# Altium PCB Sensor-Board_CONTROLLER.PcbDoc
Units mm, origin at the board's own origin, x right, y up, seen from the top; angles counter-clockwise.
Board outline 152.4 x 101.6 mm, 2 copper layers (Top Layer, Bottom Layer); 47 components, 37 nets, 154 pads, 25 vias.
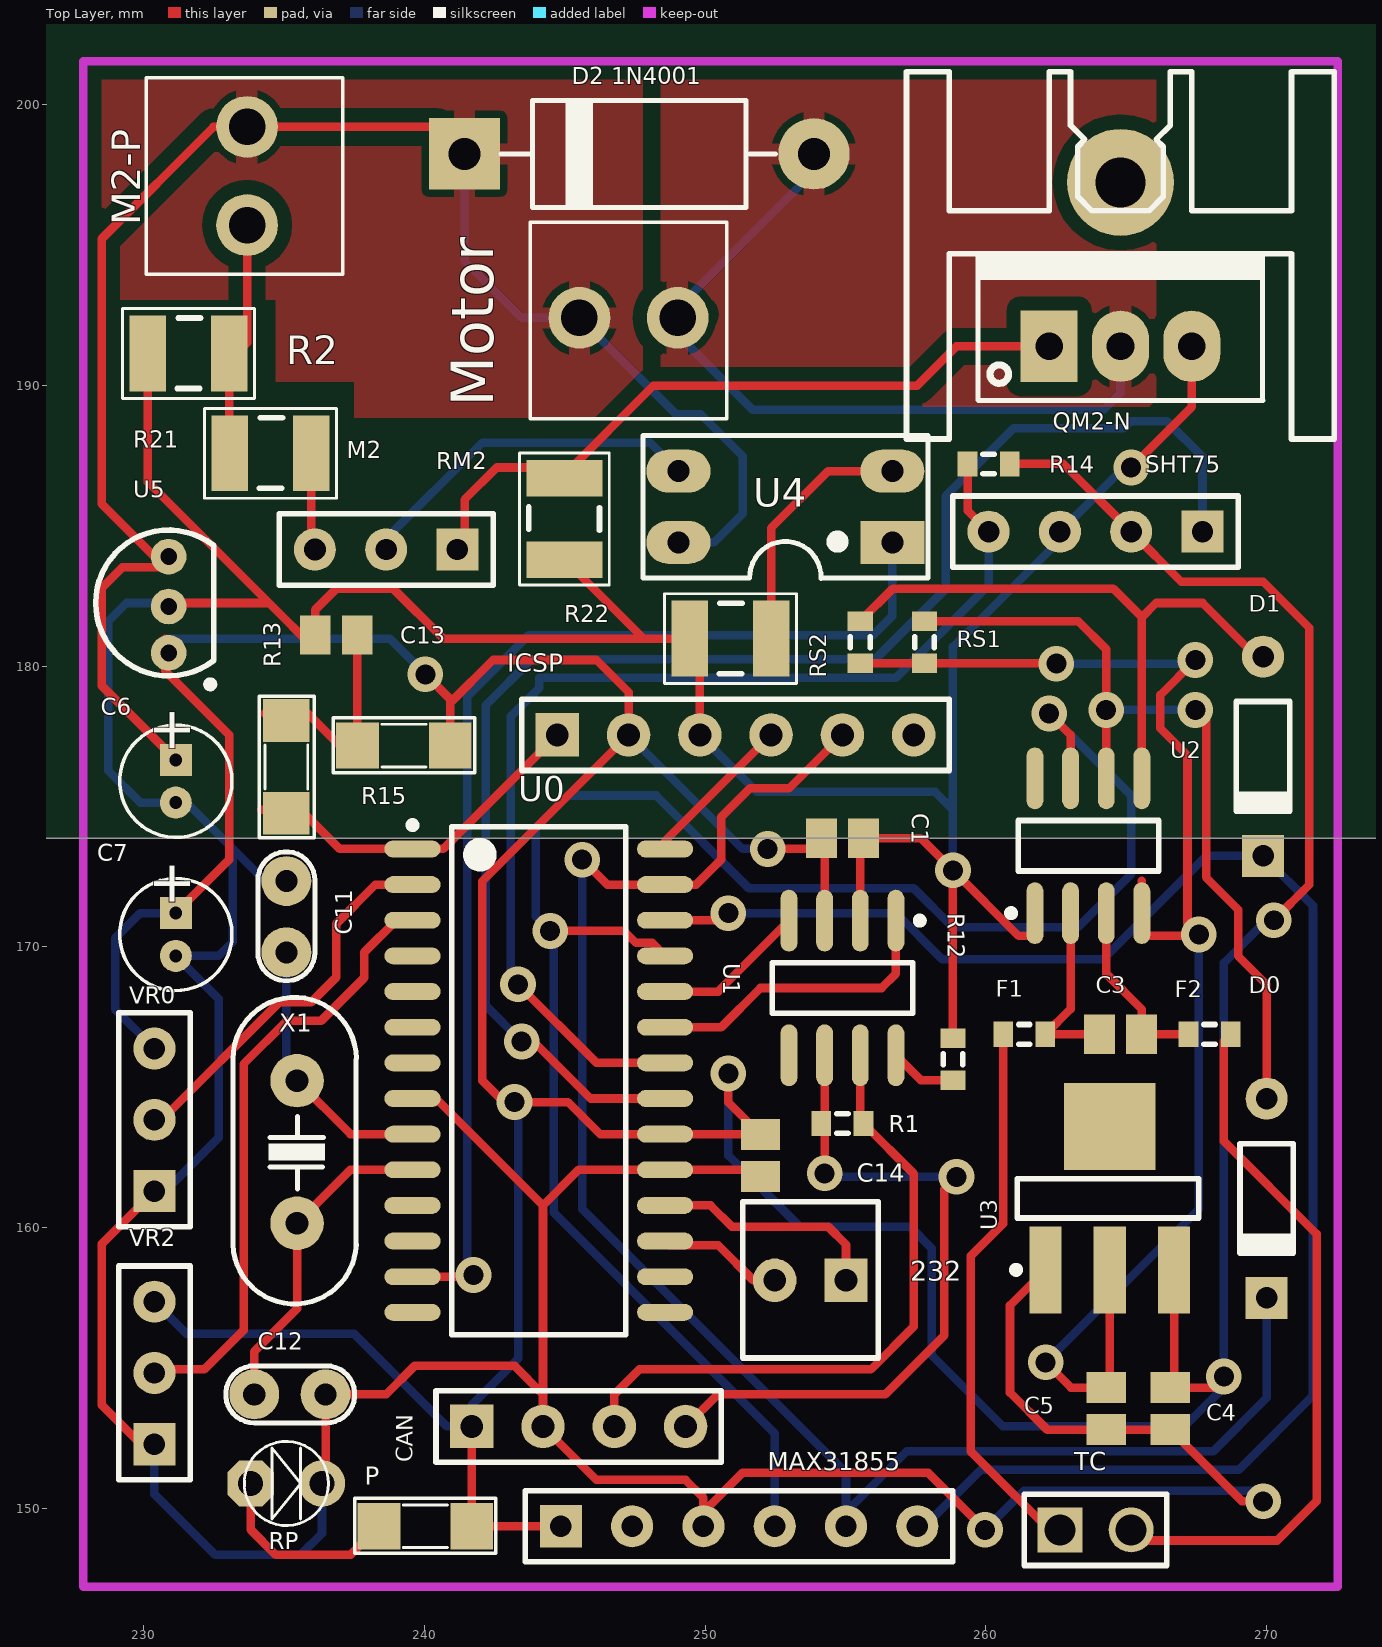
[diagram p0: Top Layer view]
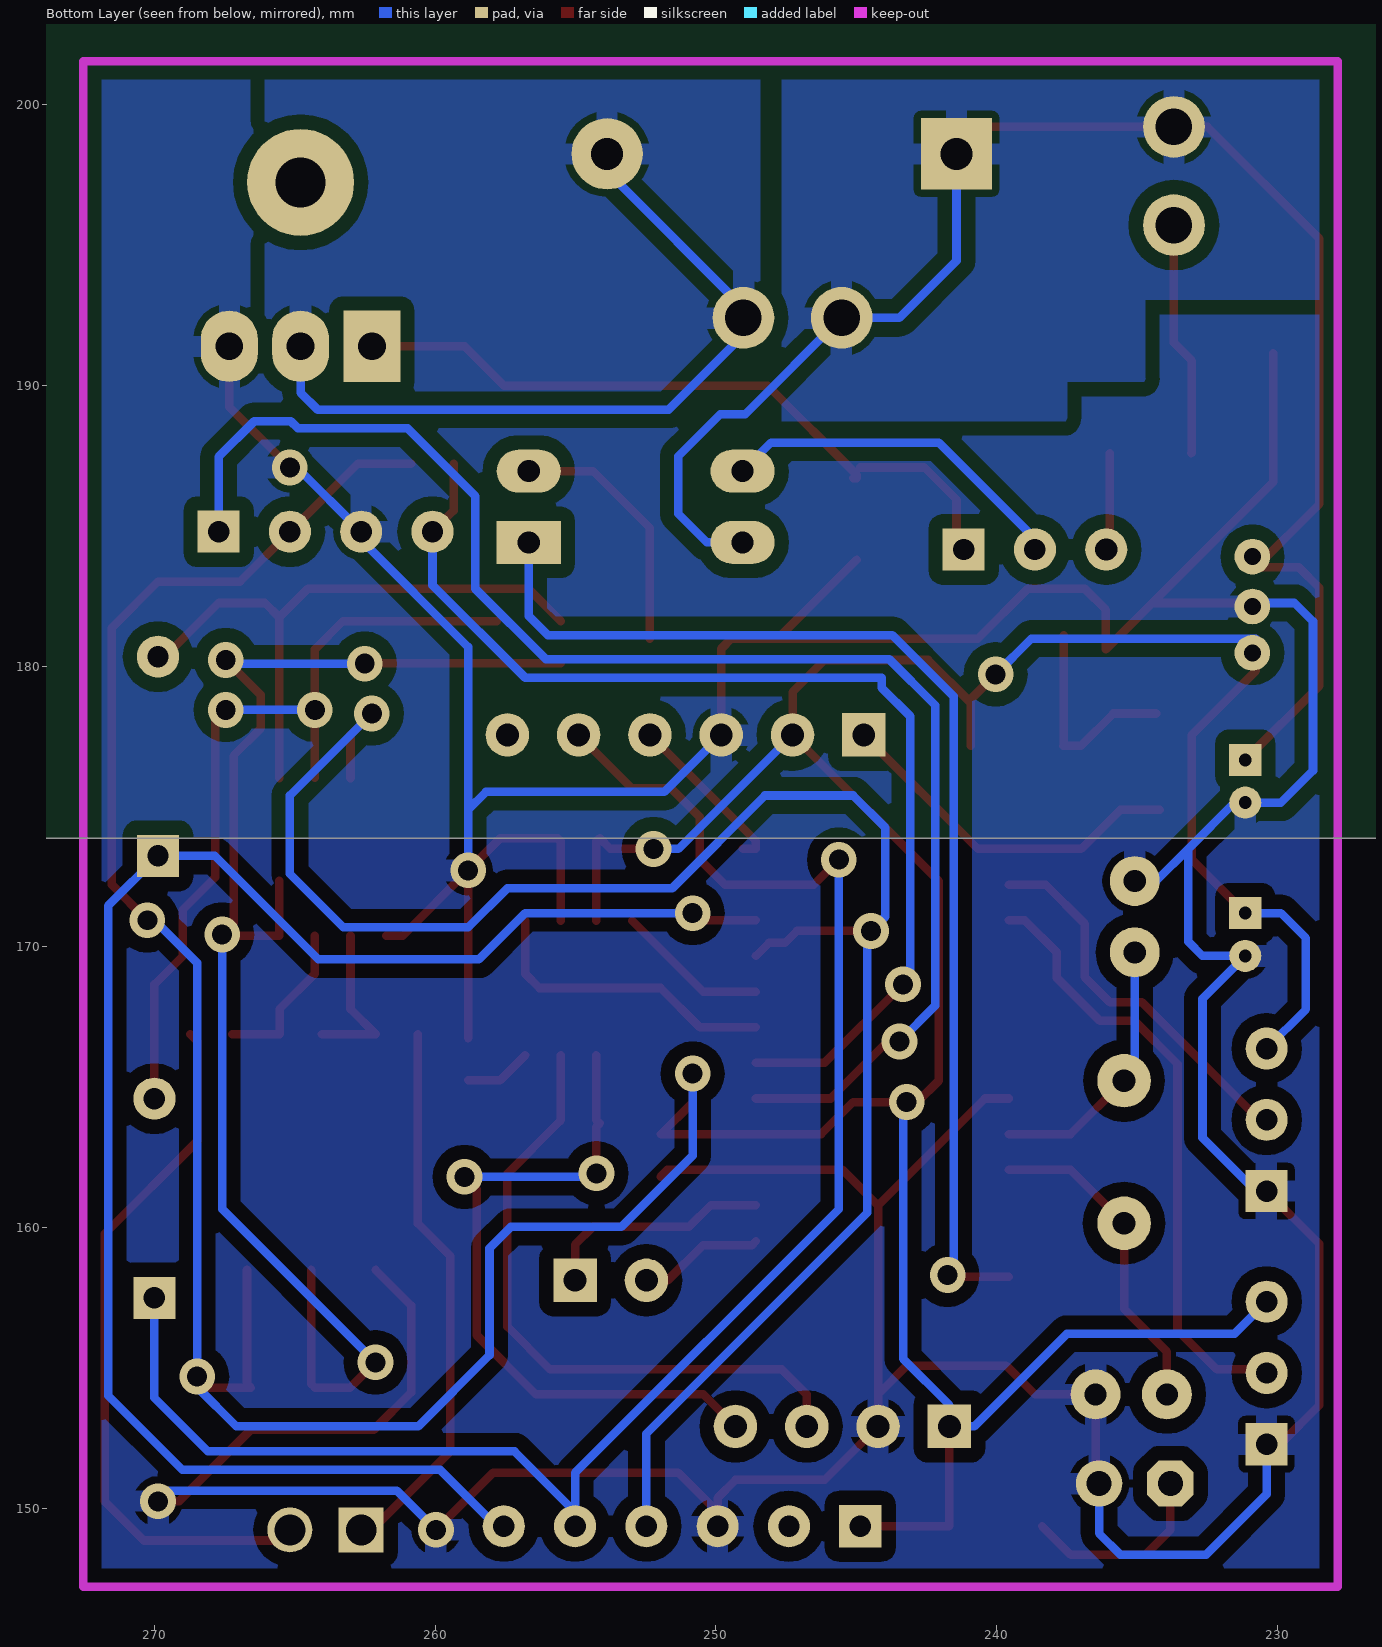
[diagram p1: Bottom Layer view, seen from below]

## Layer stack, top to bottom
Top Solder: solder mask 0.0102, Solder Resist, Dk 3.5
Top Layer: signal copper 0.0356
Dielectric 1: dielectric 0.32, FR-4, Dk 4.8
Bottom Layer: signal copper 0.0356
Bottom Solder: solder mask 0.0102, Solder Resist, Dk 3.5

## Board outline
145.923,173.863 298.323,173.863 298.323,275.463 145.923,275.463

## Design rules (kind name [scope] priority, off if disabled: settings)
Clearance "PolyGon Pour Clearance" [InPolyGon] p1: gap=0.508
Clearance [All] p2: gap=0.356
PolygonConnect [All] p1: connectstyle=Relief reliefconductorwidth=0.762 reliefentries=4 polygonreliefangle="90 Angle" airgapwidth=0.254
RoomDefinition max31855_controller_board [InComponentClass('max31855_controller_board')] p1: confinementstyle=ConfineIn formatcopy=TRUE lockcomponents=FALSE outline 299.466,175.387 303.022,175.387 303.022,180.213 299.466,180.213
RoutingVias [All] p1: holewidth=0.711 width=1.27 viastyle="Through Hole" minholewidth=0.711 minwidth=1.27 maxholewidth=0.711 maxwidth=1.27
SolderMaskExpansion [All] p1: expansion=0.102
Width VCC1 [(InNet('VCC1') AND InNet('VCC'))] p1: maxlimit=0.356 minlimit=0.356 preferedwidth=0.356
Width [All] p2: maxlimit=0.305 minlimit=0.305 preferedwidth=0.305
29 further rules are at their usual default settings.

## Components (designator, comment, footprint, x,y, rotation, side; value= is the part's Value field where it differs from the comment)
232 "Header2" HDR2 255.016,158.115 r180 top
C1 "Cap Pol3" C0805 254.889,173.863 r0 top
C3 "Cap Pol3" C0805 264.795,166.878 r0 top
C4 "Cap Pol3" C0805 266.573,153.543 r270 top
C5 "Cap Pol3" C0805 264.287,153.543 r270 top
C6 "10uF/35V" CA-ALU-4 231.14,175.895 r270 top
C7 "20uF/35V" CA-ALU-4 231.14,170.434 r270 top
C11 "22pF" CN1 235.077,171.069 r90 top
C12 "22pF" CN1 235.204,154.051 r0 top
C13 "Cap Pol3" C0805 236.855,181.102 r180 top
C14 "Cap Pol3" C0805 251.968,162.56 r270 top
CAN "Header 4" HDR1X4#1 241.681,152.908 r0 top
D0 "Diode 1N4148" DO-35 270.002,161.036 r270 top
D1 "Diode 1N4148" DO-35 269.875,176.784 r270 top
"D2 1N4001" "Diode" DIO-3A 240.792,198.247 r0 top
F1 "Res3" J1-0603 261.366,166.878 r180 top
F2 "Res3" J1-0603 267.97,166.878 r0 top
ICSP "Header 6" HDR1X6#1 244.729,177.546 r0 top
M2 "Header 3" HDR1X3#1 241.173,184.15 r180 top
M2-P "KF2" KF2-3.5 233.68,197.457 r270 top
MAX31855 "Header 6" HDR1X6#2 244.856,149.352 r0 top
Motor "Motor" KF2-3.5 247.269,192.405 r0 top
P "LED" LED-3MM-YELLOW 233.807,150.876 r0 top
QM2-N "IRF840" TO220H1 264.795,191.389 r0 top
R1 "Res3" J1-0603 254.889,163.703 r0 top
R2 "47K" RES-SMD-1210 231.648,191.135 r180 top
R12 "Res3" J1-0603 258.826,165.989 r90 top
R13 "470" SM-RES-1206 235.077,178.054 r270 top
R14 "Res3" J1-0603 260.096,187.198 r180 top
R15 "10k" SM-RES-1206 237.617,177.165 r0 top
R21 "47K" RES-SMD-1210 234.569,187.579 r180 top
R22 "10K" RES-SMD-1210 250.952,180.975 r180 top
RM2 "47K" RES-SMD-1210 244.983,185.293 r270 top
RP "10k" SM-RES-1206 238.379,149.352 r0 top
RS1 "Res3" J1-0603 257.81,180.848 r270 top
RS2 "Res3" J1-0603 255.524,180.848 r270 top
SHT75 "Header 4" HDR1X4#2 267.716,184.785 r180 top
TC "JP2" JP2-D1T 262.636,149.225 r0 top
U0 "PIC18F2480T-I/SO" SOIC-SO28_L 244.072,165.227 r0 top
U1 "MCP2551-E/SN" SOIC-SN8_N 254.889,168.529 r270 top
U2 "Component_1" "SOP8 - duplicate" 267.716,169.913 r90 top
U3 "Component_1" SOT229P700X460-4N 264.414,161.036 r90 top
U4 "PC817" DIP4 256.667,184.404 r90 top
U5 "LM78L05ACZ" PCBComponent_1 217.551,182.245 r0 top
VR0 "Header 3" HDR1X3#2 230.378,161.29 r90 top
VR2 "Header 3" HDR1X3#2 230.378,152.273 r90 top
X1 "12Mhz" XT2 235.458,162.687 r90 top

## Footprints (in the part's own frame and the unit in brackets; to place one, negate y for a bottom-side part, rotate by r counter-clockwise, add the part's x,y. Pads: shape width x height; smd on the part's side, far side on the other; paste and mask are expansions set on the pad)
C0805 [mm] "Chip Capacitor, Body 2.0x1.3mm, IPC High Density"
  rect 1.1x1.4 smd: 1(-0.75,0) 2(0.75,0)
  body extent -1.1,-0.72 1.1,0.72, height 1.4
CA-ALU-4 [mil] "Polarized capacitors, Aluminum Electrolytic Capacitors, 2-Leads, Body 5x11x2x0.5"
  rect 45x45 hole 18: 1(-30,0)
  round 45 hole 18: 2(30,0)
  silkscreen extent -79,-79 79,79, body extent -79,-77 79,80, height 295
CN1 [mil]
  round 70 hole 31: 1(-50,0) 2(50,0)
  silkscreen extent -90,-40 91,40, body extent -115,-33 115,33, height 265
DIO-3A [mil] "Diode 3A"
  round 100 hole 45: 1(515,0)
  rect 100x100 hole 45: 2(25,0)
  silkscreen extent 76,-75 461,75, body extent 4,-72 536,70, height 142
DIP4 [mil]
  rect 60x90 hole 31: 1(0,0)
  oval 60x90 hole 31: 2(100,0) 3(100,300) 4(0,300)
  silkscreen extent -50,-50 150,350, body extent -59,-10 159,305, height 170
DO-35 [mm] "Diode, Axial; Body 3.8 x 1.9 mm (LxDia. max), Lead Dia. 0.53 mm (max)"
  round 1.5 hole 0.762: 1(-3.55,0)
  rect 1.5x1.5 hole 0.762: 2(3.55,0)
  silkscreen extent -1.95,-0.95 2.05,0.95
HDR1X3#1 [mm] "Connector; Header; 3 Position"
  rect 1.5x1.5 hole 0.762: 1(0,0)
  round 1.5 hole 0.762: 2(2.54,0)
  round 1.5 hole 0.787: 3(5.08,0)
  silkscreen extent -1.27,-1.27 6.35,1.27
HDR1X3#2 [mm] "Connector; Header; 3 Position"
  rect 1.5x1.5 hole 0.762: 1(0,0)
  round 1.5 hole 0.762: 2(2.54,0) 3(5.08,0)
  silkscreen extent -1.27,-1.27 6.35,1.27
HDR1X4#1 [mil] "Connector; Header; 4 Position"
  rect 61x61 hole 32: 1(0,0)
  round 61 hole 32: 2(100,0) 3(200,0) 4(300,0)
  silkscreen extent -50,-50 350,50
HDR1X4#2 [mil] "Connector; Header; 4 Position"
  rect 59.06x59.06 hole 30: 1(0,0)
  round 59.06 hole 30: 2(100,0) 3(200,0) 4(300,0)
  silkscreen extent -50,-50 350,50
HDR1X6#1 [mil] "Connector; Header; 6 Position"
  rect 61x61 hole 32: 1(0,0)
  round 61 hole 32: 2(100,0) 3(200,0) 4(300,0) 5(400,0) 6(500,0)
  silkscreen extent -50,-50 550,50
HDR1X6#2 [mil] "Connector; Header; 6 Position"
  rect 59.06x59.06 hole 30: 1(0,0)
  round 59.06 hole 30: 2(100,0) 3(200,0) 4(300,0) 5(400,0) 6(500,0)
  silkscreen extent -50,-50 550,50
HDR2 [mil] "Connector; Header; 2 Position"
  rect 61x61 hole 32: 1(0,0)
  round 61 hole 32: 2(100,0)
  silkscreen extent -45,-110 145,109, body extent -50,-115 150,113, height 461
J1-0603 [mm] "Chip Resistor, Body 1.6x0.8mm, IPC High Density"
  rect 0.7x0.9 smd: 1(-0.75,0) 2(0.75,0)
  silkscreen extent -0.2,-0.35 0.2,0.35, body extent -0.85,-0.48 0.85,0.48, height 0.9
JP2-D1T [mm] "2 pins, 1 row, straight, gold plating"
  rect 1.6x1.6 hole 1.1: 1(0,0)
  round 1.6 hole 1.1: 2(2.54,0)
  silkscreen extent -1.27,-1.27 3.81,1.27, body extent -1.27,-1.27 3.81,1.27, height 8.54
KF2-3.5 [mm] "3,50mm - modular - blue - Horizontal wire entry - Pressure clamp - 8,4mm height - 02p"
  round 2.2 hole 1.3: 1(-1.75,0) 2(1.75,0)
  silkscreen extent -3.5,-3.6 3.5,3.4, body extent -3.95,-3.6 4.05,3.4, height 8.41
LED-3MM-YELLOW [mil]
  oct 65x65 hole 35: 1(0,0)
  round 65 hole 35: 2(100,0)
  silkscreen extent -9,-59 109,59, body extent -27,-77 117,80, height 181
PCBComponent_1 [mm]
  round 1.27 hole 0.6: 1(13.335,-1.778) 2(13.335,-0.127) 3(13.335,1.651)
  silkscreen extent 10.74,-3.02 14.94,2.6, body extent 10.72,-2.61 14.94,2.61, height 5.2
RES-SMD-1210 [mm] "Chip Capacitor, Body 3.2x2.5mm, IPC Medium Density"
  rect 1.3x2.7 smd: 1(-1.397,0) 2(1.503,0)
  silkscreen extent -2.3,-1.6 2.4,1.6, body extent -1.6,-1.25 1.6,1.25, height 0.6
SM-RES-1206 [mil]
  rect 60x65 smd: 1(0,0) 2(130,0)
  silkscreen extent -34,-38 164,39, body extent 2,-31 128,32, height 40
SOIC-SN8_N [mm] "SOIC, 8-Leads, Body 4.9x3.8mm, Pitch 1.27mm, IPC Medium Density"
  oval 2.2x0.6 smd: 1(-2.4,1.905) 2(-2.4,0.635) 3(-2.4,-0.635) 4(-2.4,-1.905) 5(2.4,-1.905) 6(2.4,-0.635) 7(2.4,0.635) 8(2.4,1.905)
  silkscreen extent -2.52,-2.5 0.9,2.88, body extent -2,-2.5 2,2.5, height 1.75
SOIC-SO28_L [mm] "SOIC, 28-Leads, Body 17.9x7.5mm, Pitch 1.27mm, IPC High Density"
  oval 2x0.6 smd: 1(-4.5,8.255) 2(-4.5,6.985) 3(-4.5,5.715) 4(-4.5,4.445) 5(-4.5,3.175) 6(-4.5,1.905) 7(-4.5,0.635) 8(-4.5,-0.635) 9(-4.5,-1.905) 10(-4.5,-3.175) 11(-4.5,-4.445) 12(-4.5,-5.715) 13(-4.5,-6.985) 14(-4.5,-8.255) 15(4.5,-8.255) 16(4.5,-6.985) 17(4.5,-5.715) 18(4.5,-4.445) 19(4.5,-3.175) 20(4.5,-1.905) 21(4.5,-0.635) 22(4.5,0.635) 23(4.5,1.905) 24(4.5,3.175) 25(4.5,4.445) 26(4.5,5.715) 27(4.5,6.985) 28(4.5,8.255)
  silkscreen extent -4.62,-9.05 3.1,9.23, body extent -3.8,-9.06 3.8,9.06, height 2.65
"SOP8 - duplicate" [mm]
  oval 2.2x0.6 smd: 1(1.283,5.969) 2(1.283,4.699) 3(1.283,3.429) 4(1.283,2.159) 5(6.083,2.159) 6(6.083,3.429) 7(6.083,4.699) 8(6.083,5.969)
  silkscreen extent 1.16,1.56 4.58,6.94, body extent 1.68,1.56 5.68,6.56, height 1.75
SOT229P700X460-4N [mm] "SOT223, 4-Leads, Body 10,90x7,00mm (avg), Pitch 2,29mm, IPC Medium Density"
  rect 3.1x1.143 smd: 1(-2.55,2.29) 2(-2.55,0) 3(-2.55,-2.29)
  rect 3.1x3.25 smd: 4(2.55,0)
  silkscreen extent -2.67,-3.17 0.7,3.46, body extent -1.85,-3.43 1.85,3.17, height 4.6
TO220H1 [mil] "TO-220 - 1-2-3"
  round 150 hole 70: 0(0,230)
  rect 80x100 hole 39: 1(-100,0)
  oval 80x100 hole 39: 2(0,0) 3(100,0)
  silkscreen extent -300,-130 300,385, body extent -246,-82 250,329, height 1000
XT2 [mil] "Footpin for Crystal 2 pin"
  round 75 hole 32: 1(-100,0) 2(100,0)
  silkscreen extent -213,-83 217,90, body extent -216,-87 216,90, height 144

## Part data
232: "Header IDC, 2 x 1 Pin Vertical 2.54mm Pitch (Non-Boxed, Male)"
C1 C3 C4 C5 C13 C14: "Polarized Capacitor (Surface Mount)"
C6 C7: library part CN-ALU-DIP, "Capacitor (Semiconductor SIM Model)"
C11 C12: library part CN0, "Cremic For Xtal 1pF => 100pF"
CAN SHT75: "Header, 4-Pin"
D0 D1: "High Conductance Fast Diode"
"D2 1N4001": "Default Diode"
F1 F2 R1 R12 R14 RS1 RS2: "Resistor"
ICSP MAX31855: "Header, 6-Pin"
M2 VR0 VR2: "Header, 3-Pin"
Motor: library part KF2
P: "LED Single colour Green and Red"
QM2-N: "MOSFET N - CHANNEL 500V - 0.75 - 8A - TO-220"
R2 R21 R22 RM2: library part Res-SMD, "Resistor"
R13 R15 RP: library part R, "Resistor 1/4W"
TC: "WR-PHD 2.54 mm Angled Socket Header"
U0: "Enhanced Flash Microcontroller with ECAN Technology, 10-Bit A/D and nanoWatt Technology, 16K Flash, 28-Pin SOIC, Industrial Temperature Range, Tape and Reel"
U1: "High-Speed CAN Transceiver, 8-Pin SOIC, Extended Temperature"
U4: "Single Opto"
U5: "3-Terminal Positive Regulators, 3-pin TO-92"
X1: library part XT2, "Crystal, 32.768 KHz, -40 to 85 degC, 3.2 x 1.5 x 0.9 mm SMD"

## Via types
v1: diameter 1.27, hole 0.711, Top Layer to Bottom Layer, 25 vias

## Nets (pads, with @x,y where several pads share a name; then routed paths per layer and width w, separated by ;. In a path a pad name is that pad's centre, name@x,y a point inside that pad or via, vN(x,y) a via of type N, cw(c..) or ccw(c..) an arc to the next point about the centre after c; other vN are vias at no path point)
3.3V: C5.1 RS1.2 RS2.2 U2.4 U3.2 | length 51.4
  Top Layer w0.305: RS2.2 RS1.2 262.497,180.098 v1(262.509,180.086) ; v1(262.128,155.194) 263.029,154.293 C5.1 264.414,154.42 U3.2 ; 265.557,172.351 U2.4 265.557,170.383 267.538,170.383 v1(267.589,170.434) 267.183,170.84 267.183,176.809 266.217,177.775 266.217,178.968 v1(267.462,180.213)
  Bottom Layer w0.305: v1(262.128,155.194) 267.589,160.655 v1(267.589,170.434) v1@267.335,170.434 ; v1(262.509,180.086) 267.335,180.086 v1(267.462,180.213)
GND1: C1.2 C4.2 C5.2 C6.2 C7.2 C11.2 C12.2 C13.2 C14.2 CAN.2 ICSP.3 MAX31855.3 P.2 QM2-N.3 R2.2 R12.2 R22.2 RM2.2 SHT75.3 U0.8 U0.19 U1.2 U2.1 U3.1 U5.2 VR0.1 VR2.1 | length 222.4
  Top Layer w0.305: R2.2 230.145,186.554 234.454,182.245 ; VR2.1 229.895,152.273 228.498,153.67 228.498,159.41 VR0.1 ; U5.2@230.759,182.245 234.454,182.245 ; P.2 236.474,151.003 C12.2 238.633,154.051 239.649,155.067 243.205,155.067 244.221,154.051 ; U0.8 240.411,164.592 244.221,160.782 ; RM2.2 247.798,180.975 ; ICSP.3 249.809,180.615 R22.2 247.798,180.975 ; MAX31855.3@249.936,149.098 MAX31855.3 MAX31855.3@249.936,149.86 ; C14.2 251.726,162.052 U0.19 245.491,162.052 244.221,160.782 ; U1.2 255.524,173.748 C1.2 257.683,173.863 v1(258.826,172.72) ; R12.2 v1(258.826,172.72) ; v1(259.969,149.225) 257.937,151.257 251.333,151.257 MAX31855.3@249.936,149.86 ; U2.1@261.747,170.383 261.163,170.383 v1(258.826,172.72) ; U3.1 260.858,157.22 260.858,154.114 262.186,152.787 262.624,152.793 C5.2 C4.2 269.125,150.241 v1(269.875,150.241) ; v1(265.176,187.071) 267.335,189.23 QM2-N.3 ; 234.454,182.245 236.105,180.594 C13.2 236.105,182.003 236.855,182.753 238.887,182.753 240.665,180.975 247.798,180.975 ; 244.221,154.051 CAN.2 246.126,151.003 249.301,151.003 249.936,150.368 MAX31855.3@249.936,149.86 ; 244.221,154.051 244.221,160.782
  Bottom Layer w0.305: VR2.1 230.378,150.495 232.537,148.336 235.585,148.336 236.347,149.098 P.2 ; VR0.1 230.759,161.29 232.664,163.195 232.664,168.148 C7.2 232.664,169.672 233.172,170.18 233.172,173.482 ; U5.2@230.759,182.245 229.387,182.245 228.727,181.585 228.727,176.276 229.87,175.133 C6.2 231.521,175.133 233.172,173.482 ; C11.2@235.585,172.339 C11.2 234.315,172.339 233.172,173.482 ; ICSP.3 251.841,175.514 258.191,175.514 258.826,174.879 ; v1(258.826,172.72) 258.826,174.879 ; v1(259.969,149.225) 261.366,150.622 269.494,150.622 v1(269.875,150.241) ; v1(265.176,187.071) 264.922,187.071 SHT75.3 262.636,184.486 258.826,180.676 258.826,174.879
Net232_1: 232.1 U0.18 | length 8.3
  Top Layer w0.305: U0.18 250.19,160.782 250.952,160.02 254.381,160.02 255.016,159.385 232.1
Net232_2: 232.2 U0.17 | length 4.5
  Top Layer w0.305: U0.17 248.724,159.36 250.469,159.36 251.714,158.115 232.2
NetC3_1: C3.1 F1.1 U2.2 | length 5.8
  Top Layer w0.305: U2.2@263.017,170.383 263.017,167.779 F1.1 C3.1
NetC3_2: C3.2 F2.1 U2.3 | length 5.7
  Top Layer w0.305: U2.3@264.287,170.383 264.287,169.037 265.545,167.779 C3.2 F2.1
NetC11_1: C11.1 U0.9 X1.2 | length 9.6
  Top Layer w0.305: X1.2 237.363,163.322 U0.9
  Bottom Layer w0.305: C11.1 235.077,165.608 X1.2
NetC12_1: C12.1 U0.10 X1.1 | length 11.6
  Top Layer w0.305: C12.1 233.934,155.575 235.458,157.099 X1.1 237.363,162.052 U0.10
NetC13_1: C13.1 R13.1 R15.1 | length 7.7
  Top Layer w0.305: R13.1@234.315,178.308 235.839,178.308 236.982,177.165 R15.1 237.605,177.177 C13.1
NetCAN_3: CAN.3 R1.2 U1.7 | length 23.3
  Top Layer w0.305: CAN.3 246.761,154.051 247.65,154.94 255.905,154.94 257.429,156.464 257.429,161.913 R1.2 255.524,163.818 U1.7
NetCAN_4: CAN.4 R1.1 U1.6 | length 25.4
  Top Layer w0.305: CAN.4 250.444,154.051 256.413,154.051 258.521,156.159 258.521,161.366 v1(258.953,161.798) ; v1(254.254,161.925) 254.254,163.588 R1.1 254.254,163.818 U1.6
  Bottom Layer w0.305: v1(254.254,161.925) 254.381,161.798 v1(258.953,161.798)
NetD0_1: D0.1 RS1.1 U2.6 | length 29.5
  Top Layer w0.305: RS1.1 263.283,181.598 264.287,180.594 v1(264.287,178.435) U2.6@264.287,176.022 ; v1(267.462,178.435) 267.843,178.054 267.843,172.466 268.986,171.323 268.986,169.672 270.002,168.656 D0.1
  Bottom Layer w0.305: v1(264.287,178.435) v1(267.462,178.435)
NetD0_2: D0.2 ICSP.5 MAX31855.5 U0.27 | length 61
  Top Layer w0.305: v1(245.618,173.101) 246.507,172.212 U0.27 249.682,172.212 250.571,173.101 250.571,174.625 251.587,175.641 252.984,175.641 ICSP.5 ; ICSP.5@254.394,177.432 ICSP.5@254.508,177.546
  Bottom Layer w0.305: v1(245.618,173.101) 245.618,160.655 255.016,151.257 MAX31855.5@255.016,149.86 ; MAX31855.5@255.016,149.098 MAX31855.5 MAX31855.5@255.016,149.86 ; D0.2 270.002,153.924 268.097,152.019 257.175,152.019 MAX31855.5@255.016,149.86
NetD1_1: D1.1 RS2.1 U2.5 | length 22.4
  Top Layer w0.305: RS2.1 256.679,182.753 264.541,182.753 265.557,181.737 ; U2.5 265.557,181.737 ; D1.1@269.691,179.883 269.748,179.826 269.748,180.213 267.716,182.245 266.065,182.245 265.557,181.737
NetD1_2: D1.2 MAX31855.6 U0.26 | length 59.7
  Top Layer w0.305: U0.26 250.571,170.942 v1(250.825,171.196)
  Bottom Layer w0.305: v1(250.825,171.196) 256.794,171.196 258.445,169.545 264.16,169.545 267.849,173.234 D1.2 271.653,171.456 271.653,154.006 269.006,151.359 259.817,151.359 MAX31855.6@257.556,149.098
"NetD2 1N4001_1": "D2 1N4001.1" Motor.2 QM2-N.2 | length 27.1
  Top Layer w0.305: Motor.2@249.781,192.532 Motor.2@249.809,192.532
  Bottom Layer w0.305: Motor.2@248.92,192.659 253.873,197.612 253.873,198.247 ; Motor.2 249.019,191.798 251.689,189.128 264.185,189.128 264.795,189.738 QM2-N.2
NetF1_2: F1.2 TC.1 | length 19.8
  Top Layer w0.305: F1.2 260.616,160.135 259.461,158.98 259.461,152.019 TC.1@262.636,148.844
NetF2_2: F2.2 TC.2 | length 25.3
  Top Layer w0.305: TC.2@265.176,148.844 270.383,148.844 271.78,150.241 271.78,159.766 268.478,163.068 268.478,166.636 F2.2
NetICSP_1: ICSP.1 R13.2 U0.1 | length 12.8
  Top Layer w0.305: 234.188,174.879 235.585,174.879 236.982,173.482 U0.1 240.665,173.482 ICSP.1
NetICSP_4: ICSP.4 U0.28 | length 6.6
  Top Layer w0.305: U0.28@249.047,173.482 U0.28 248.572,173.769 ICSP.4
  Bottom Layer w0.305: ICSP.4 ICSP.4@252.349,178.054
NetM2-P_2: M2-P.2 R2.1 R21.2 | length 8.4
  Top Layer w0.305: R21.2 233.045,187.6 233.045,190.881 233.68,191.516 M2-P.2
NetM2_1: M2.1 QM2-N.1 RM2.1 | length 25.2
  Top Layer w0.305: M2.1 241.427,184.404 241.427,185.928 242.57,187.071 RM2.1@244.856,187.071 ; RM2.1@245.11,186.69 RM2.1 244.983,186.817 248.158,189.992 257.556,189.992 258.953,191.389 QM2-N.1
NetM2_2: M2.2 U4.3 | length 14.1
  Top Layer w0.305: M2.2 239.014,184.15 M2.2@239.014,184.449 ; U4.3@248.285,186.944 U4.3
  Bottom Layer w0.305: M2.2 238.633,184.531 242.062,187.96 248.031,187.96 U4.3
NetM2_3: M2.3 R21.1 | length 3.5
  Top Layer w0.305: R21.1 235.966,184.277 M2.3@236.093,184.404
NetMAX31855_4: MAX31855.4 U0.25 U2.7 | length 67.3
  Top Layer w0.305: v1(244.475,170.561) 247.11,170.561 247.537,170.134 248.11,170.134 U0.25 ; v1(262.255,178.308) 263.017,177.546 U2.7
  Bottom Layer w0.305: MAX31855.4@252.476,149.098 MAX31855.4 252.476,152.654 244.602,160.528 244.602,170.307 244.348,170.561 v1(244.475,170.561) 243.967,171.069 243.967,174.244 245.11,175.387 248.25,175.387 251.552,172.085 257.429,172.085 258.826,170.688 263.271,170.688 265.176,172.593 265.176,175.387 v1(262.255,178.308)
NetP_1: P.1 RP.1 | length 7
  Top Layer w0.305: P.1 233.807,149.225 234.696,148.336 237.363,148.336 RP.1
NetR12_1: R12.1 U1.8 | length 2.4
  Top Layer w0.305: U1.8 257.684,165.239 R12.1
NetR14_2: R14.2 SHT75.4 U0.22 | length 40
  Top Layer w0.305: v1(243.332,168.656) 246.126,165.862 U0.22 ; R14.2 259.346,185.535 SHT75.4
  Bottom Layer w0.305: v1(243.332,168.656) 243.078,168.656 243.078,178.212 244.094,179.228 244.094,179.578 256.794,179.578 260.096,182.88 SHT75.4
NetR22_1: R22.1 U4.2 | length 9.1
  Top Layer w0.305: R22.1 252.349,184.912 254.381,186.944 U4.2
NetSHT75_1: SHT75.1 U0.21 | length 53.3
  Top Layer w0.305: v1(243.459,166.624) 243.885,166.624 245.917,164.592 U0.21
  Bottom Layer w0.305: v1(243.459,166.624) 242.189,167.894 242.189,178.607 243.82,180.238 256.057,180.238 258.572,182.753 258.572,186.055 260.985,188.468 264.89,188.468 265.144,188.722 266.446,188.722 267.716,187.452 SHT75.1
NetU0_2: U0.2 VR0.2 | length 13.8
  Top Layer w0.305: VR0.2 230.632,163.83 234.823,168.021 235.966,168.021 236.855,168.91 236.855,170.815 238.252,172.212 U0.2
NetU0_3: U0.3 VR2.2 | length 21.8
  Top Layer w0.305: VR2.2@230.505,154.94 232.156,154.94 233.553,156.337 233.553,165.817 235.097,167.361 236.322,167.361 237.856,168.895 237.856,169.799 238.999,170.942 U0.3
NetU0_13: U0.13 U4.1 | length 42
  Top Layer w0.305: U0.13 241.681,158.242 v1(241.744,158.305)
  Bottom Layer w0.305: v1@241.681,158.242 v1(241.744,158.305) 241.808,158.369 241.529,158.648 241.529,178.918 243.713,181.102 255.987,181.102 256.667,181.782 U4.1
NetU0_23: U0.23 U1.1 | length 10.9
  Top Layer w0.305: U0.23 250.571,167.132 251.968,168.529 256.286,168.529 256.794,169.037 U1.1
NetU0_24: U0.24 U1.4 | length 5.5
  Top Layer w0.305: U0.24 250.457,168.402 U1.4
VCC1: C1.1 C4.1 C7.1 C14.1 CAN.1 ICSP.2 MAX31855.1 R14.1 R15.2 RP.2 SHT75.2 U0.20 U1.3 U3.3 U5.1 VR0.3 VR2.3 | length 187.5
  Top Layer w0.305: U5.1@230.759,180.975 230.759,179.832 233.045,177.546 233.045,173.101 C7.1 ; v1(240.03,179.705) 240.919,178.816 240.919,178.689 ; R15.2 240.919,178.689 ; CAN.1 RP.2 244.602,149.352 MAX31855.1@244.856,149.098 ; v1(250.825,165.481) 250.825,164.453 C14.1@251.956,163.322 ; C14.1 C14.1@251.956,163.322 ; v1(252.222,173.482) 253.758,173.482 C1.1 254.254,173.748 U1.3 ; R14.1 262.763,187.198 SHT75.2 266.954,183.007 269.875,183.007 271.526,181.356 271.526,172.212 v1(270.256,170.942) ; U3.3 266.704,154.424 C4.1 268.085,154.293 v1(268.478,154.686) ; 240.919,178.689 242.443,180.213 246.126,180.213 247.269,179.07 ICSP.2 242.062,172.339 242.062,165.227 242.824,164.465 v1(243.205,164.465) 245.11,164.465 246.253,163.322 U0.20 C14.1@251.956,163.322
  Bottom Layer w0.305: VR2.3 231.521,156.21 237.49,156.21 240.792,152.908 CAN.1 241.681,153.67 243.332,155.321 243.332,164.338 v1(243.205,164.465) v1@242.887,164.782 ; VR0.3 228.981,167.767 228.981,170.307 229.87,171.196 C7.1 ; U5.1@230.759,180.975 238.76,180.975 v1(240.03,179.705) ; ICSP.2 251.333,173.482 v1(252.222,173.482) ; v1(250.825,165.481) 250.825,162.56 253.365,160.02 257.302,160.02 258.064,159.258 258.064,155.448 260.604,152.908 267.081,152.908 268.478,154.305 v1(268.478,154.686) 268.478,169.418 v1@270.002,170.942
VCCP: "D2 1N4001.2" C6.1 M2-P.1 Motor.1 U4.4 U5.3 | length 59.7
  Top Layer w0.305: C6.1 228.498,179.299 228.498,182.778 229.235,183.515 230.759,183.515 228.498,185.776 228.498,195.224 232.481,199.207 M2-P.1 240.467,199.207 241.427,198.247 ; U4.4 U4.4@249.936,184.404
  Bottom Layer w0.305: 241.427,198.247 241.427,194.437 243.459,192.405 Motor.1 248.948,188.976 249.837,188.976 251.333,187.48 251.333,185.42 250.317,184.404 U4.4
pads on no net: ICSP.6 MAX31855.2 QM2-N.0 U0.4 U0.5 U0.6 U0.7 U0.11 U0.12 U0.14 U0.15 U0.16 U1.5 U2.8 U3.4

## Polygon pours and split planes (outlines as drawn)
GND1 on Bottom Layer "Bottom Layer-No Net 1" (solid, pour order 38): 227.838,201.549 272.288,201.549 272.288,147.447 272.542,147.193 228.092,147.193 228.092,201.041 227.838,201.295
VCCP on Bottom Layer "Bottom Layer-No Net" (solid, pour order 28): 227.838,201.549 247.777,201.549 247.65,201.422 247.65,188.722 237.363,188.722 237.49,188.849 237.49,190.119 234.569,190.119 234.696,190.246 234.696,193.04 227.965,193.04 227.838,193.167
"NetD2 1N4001_1" on Bottom Layer "Bottom Layer-No Net" (solid, pour order 34): 248.412,201.549 266.065,201.549 266.065,189.357 265.938,189.23 248.412,189.23
VCCP on Top Layer "Bottom Layer-No Net" (solid, pour order 30): 227.838,201.549 247.777,201.549 247.777,188.849 237.49,188.849 237.49,190.119 234.696,190.119 234.696,193.04 227.965,193.04 227.838,193.167
"NetD2 1N4001_1" on Top Layer "Bottom Layer-No Net" (solid, pour order 32): 248.666,201.549 266.065,201.549 266.065,189.484 265.811,189.23 248.412,189.23 248.412,201.295

## Keep-outs
Keep-Out Layer:
  lines w0.305: 227.838,147.193 272.542,147.193 272.542,201.549 227.838,201.549 227.838,147.193

## Text inside footprints (layer, text, board x,y; h text height)
C6: Top Overlay "+" at 230.378,178.562 h1.5 r270
C7: Top Overlay "+" at 230.378,173.101 h1.5 r270